# EAGLE board Tickler-Brains&Brawn (EAGLE 7.3.0)
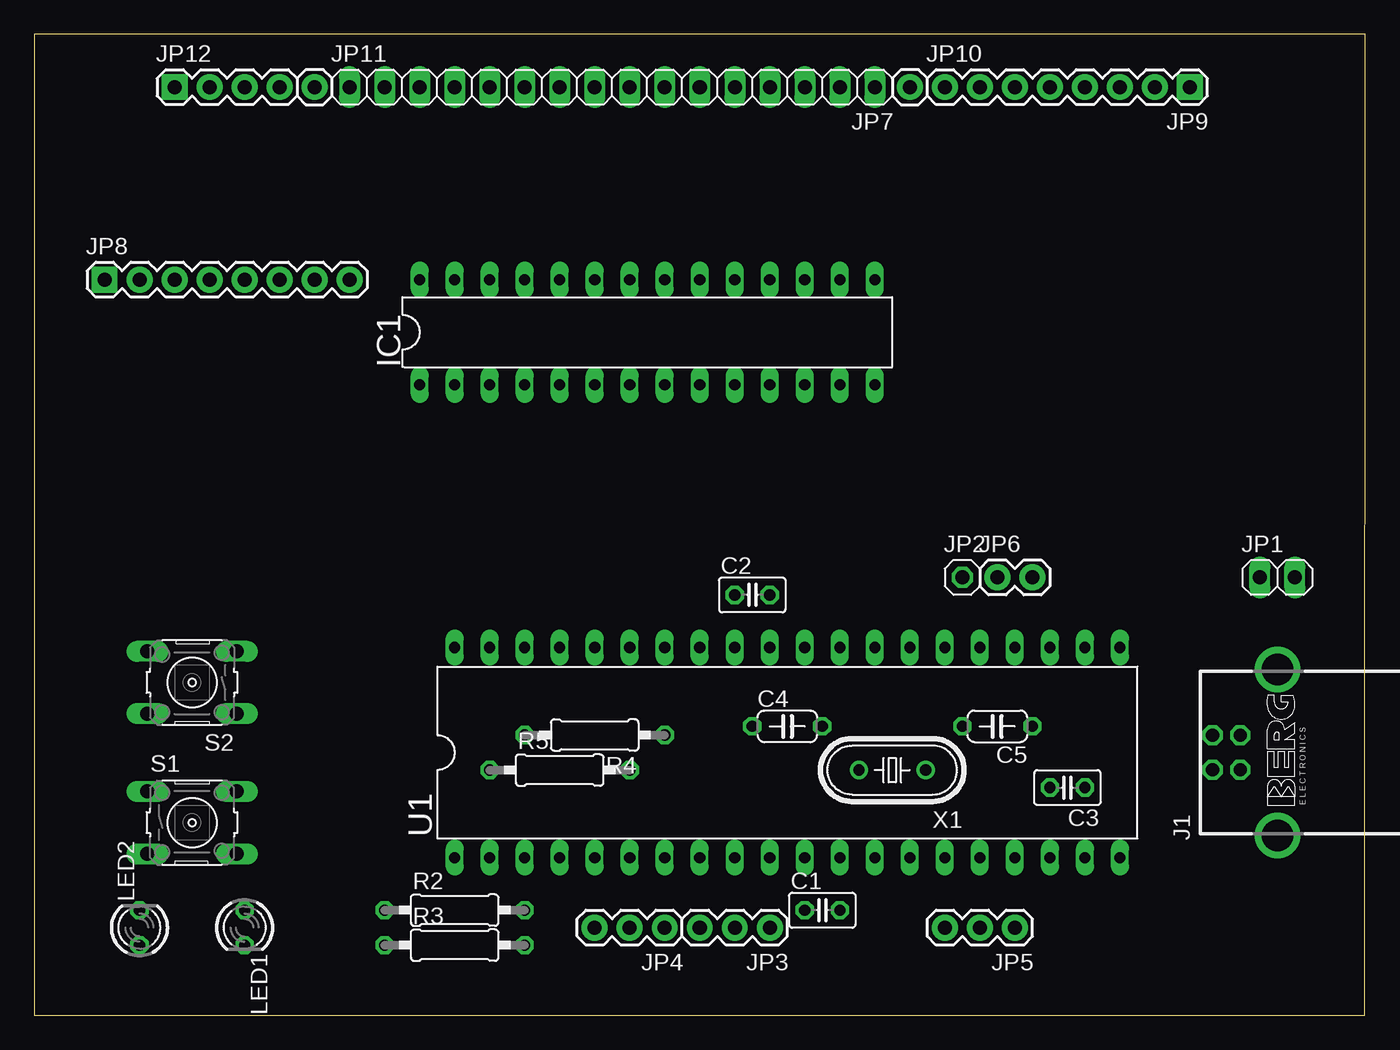
[diagram p0: board, top side]
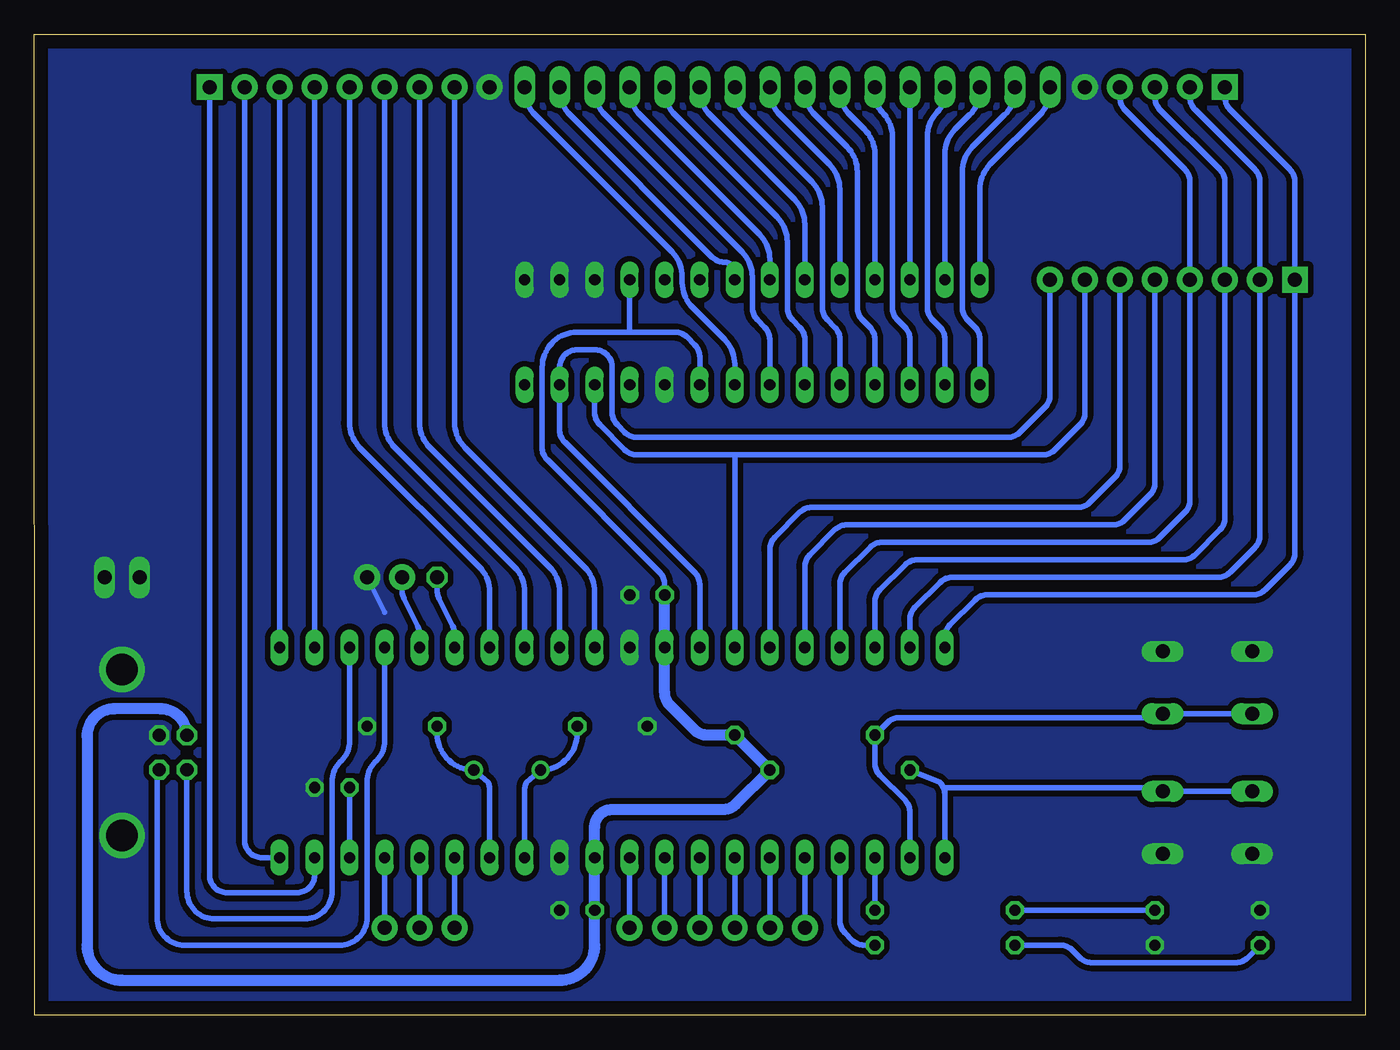
[diagram p1: board, bottom side, seen from below]

Size 96.52 x 71.12 mm. Coordinates in mm from the lower left corner, seen from the top.
Outline: 0,0 96.5,0 96.52,71.12 0,71.12 0,0
Copper layers (1*16): Top 0.035mm / dielectric 1.5mm / Bottom 0.035mm
Design rules "default": minimum track width 10mil, minimum drill 24mil, track to track 8mil, track to pad 8mil, pad to pad 8mil, via to via 8mil, smd to smd 8mil, copper to edge 40mil, drill to drill 8mil, minimum pad ring 10mil, minimum via ring 8mil, stop-mask expansion 4mil, vias tented up to drill 0mil, thermal gap 10mil

## Footprints (pad centres in the part's own frame; a part is rotated, then mirrored left to right if it is on the bottom)
C025-025X050 = drill 0.813 octagon: 1 -1.27,0; 2 1.27,0
C050-024X044 = drill 0.813 octagon: 1 -2.54,0; 2 2.54,0
DIL28-3 = drill 0.813 long: 1 -16.51,-3.81; 2 -13.97,-3.81; 3 -11.43,-3.81; 4 -8.89,-3.81; 5 -6.35,-3.81; 6 -3.81,-3.81; 7 -1.27,-3.81; 8 1.27,-3.81; 9 3.81,-3.81; 10 6.35,-3.81; 11 8.89,-3.81; 12 11.43,-3.81; 13 13.97,-3.81; 14 16.51,-3.81; 15 16.51,3.81; 16 13.97,3.81; 17 11.43,3.81; 18 8.89,3.81; 19 6.35,3.81; 20 3.81,3.81; 21 1.27,3.81; 22 -1.27,3.81; 23 -3.81,3.81; 24 -6.35,3.81; 25 -8.89,3.81; 26 -11.43,3.81; 27 -13.97,3.81; 28 -16.51,3.81
PN61729-S = drill 0.95 octagon: 1 1.25,4.71; 2 -1.25,4.71; 3 -1.25,2.71; 4 1.25,2.71 | drill 2.3 pad 2.9: S1 -6.02,0; S2 6.02,0
1X02 = drill 1.016 long: 1 -1.27,0; 2 1.27,0
1X01 = drill 1.016 octagon: 1 0,0
1X03 = drill 1.016 pad 1.88: 1 0,0; 2 2.54,0; 3 5.08,0
1X02' = drill 1.016 pad 1.88: 1 0,0; 2 2.54,0
1X16 = drill 1.016 long: 1 -19.05,0; 2 -16.51,0; 3 -13.97,0; 4 -11.43,0; 5 -8.89,0; 6 -6.35,0; 7 -3.81,0; 8 -1.27,0; 9 1.27,0; 10 3.81,0; 11 6.35,0; 12 8.89,0; 13 11.43,0; 14 13.97,0; 15 16.51,0; 16 19.05,0
1X08 = drill 1.016 pad 1.88 square: 1 0,0 | drill 1.016 pad 1.88: 2 2.54,0; 3 5.08,0; 4 7.62,0; 5 10.16,0; 6 12.7,0; 7 15.24,0; 8 17.78,0
1X01' = drill 1.016 pad 1.88: 1 0,0
1X04 = drill 1.016 pad 1.88 square: 1 0,0 | drill 1.016 pad 1.88: 2 2.54,0; 3 5.08,0; 4 7.62,0
LED3MM = drill 0.813 octagon: A -1.27,0; K 1.27,0
0207/10 = drill 0.813 octagon: 1 -5.08,0; 2 5.08,0
B3F-10XX = drill 1.016 long: 1 -3.251,2.261; 2 3.251,2.261; 3 -3.251,-2.261; 4 3.251,-2.261
DIL40 = drill 0.813 long: 1 -24.13,-7.62; 2 -21.59,-7.62; 3 -19.05,-7.62; 4 -16.51,-7.62; 5 -13.97,-7.62; 6 -11.43,-7.62; 7 -8.89,-7.62; 8 -6.35,-7.62; 9 -3.81,-7.62; 10 -1.27,-7.62; 11 1.27,-7.62; 12 3.81,-7.62; 13 6.35,-7.62; 14 8.89,-7.62; 15 11.43,-7.62; 16 13.97,-7.62; 17 16.51,-7.62; 18 19.05,-7.62; 19 21.59,-7.62; 20 24.13,-7.62; 21 24.13,7.62; 22 21.59,7.62; 23 19.05,7.62; 24 16.51,7.62; 25 13.97,7.62; 26 11.43,7.62; 27 8.89,7.62; 28 6.35,7.62; 29 3.81,7.62; 30 1.27,7.62; 31 -1.27,7.62; 32 -3.81,7.62; 33 -6.35,7.62; 34 -8.89,7.62; 35 -11.43,7.62; 36 -13.97,7.62; 37 -16.51,7.62; 38 -19.05,7.62; 39 -21.59,7.62; 40 -24.13,7.62
HC49U-V = drill 0.813: 1 -2.413,0; 2 2.413,0

## Placement (x,y rotation side)
C1  100nF  [C025-025X050]  57.15,7.62 0 top
C2  100nF  [C025-025X050]  52.07,30.48 0 top
C3  470nF  [C025-025X050]  74.93,16.51 180 top
C4  15pF  [C050-024X044]  54.61,20.95 0 top
C5  15pF  [C050-024X044]  69.85,20.95 180 top
IC1  MCP23S17SP  [DIL28-3]  44.45,49.53 0 top
J1  PN61729-S  [PN61729-S]  90.17,19.05 90 top
JP1  gnd  [1X02]  90.17,31.75 0 top
JP2  trig  [1X01]  67.31,31.75 0 top
JP3  [1X03]  53.34,6.35 180 top
JP4  [1X03]  45.72,6.35 180 top
JP5  [1X03]  71.12,6.35 180 top
JP6  tx  [1X02']  69.85,31.75 0 top
JP7  [1X16]  41.91,67.31 180 top
JP8  [1X08]  5.08,53.34 0 top
JP9  [1X08]  83.82,67.31 180 top
JP10  M01PTH  [1X01']  63.5,67.31 0 top
JP11  M01PTH  [1X01']  20.32,67.31 0 top
JP12  [1X04]  10.16,67.31 0 top
LED1  rdy  [LED3MM]  15.24,6.35 270 top
LED2  att  [LED3MM]  7.62,6.35 90 top
R2  1K  [0207/10]  30.48,7.62 0 top
R3  1K  [0207/10]  30.48,5.08 0 top
R4  10K  [0207/10]  40.64,20.32 180 top
R5  10K  [0207/10]  38.1,17.78 0 top
S1  reset  [B3F-10XX]  11.43,13.97 0 top
S2  usr/boot  [B3F-10XX]  11.43,24.13 180 top
U1  PIC18F4550_40  [DIL40]  54.61,19.05 0 top
X1  20Mhz  [HC49U-V]  62.23,17.78 180 top

## Library data of the parts
C1-C5 R2-R5 = rcl
IC1 = microchip; MF: MICROCHIP; MPN: MCP23S17-E/SP; OC_FARNELL: 1292238; OC_NEWARK: 31K2951
J1 = con-berg; OC_FARNELL: unknown; OC_NEWARK: unknown
JP1 JP2 JP7 = pinhead
JP3-JP6 JP8-JP12 = SparkFun
LED1 LED2 = led
S1 S2 = switch-omron; MPN: B3F-1000; OC_FARNELL: 176432; OC_NEWARK: 36M3542
U1 = microchip; MF: MICROCHIP; MPN: PIC18F4550-I/P; OC_FARNELL: 9321357; OC_NEWARK: 74K8623
X1 = crystal; OC_FARNELL: 1666969; OC_NEWARK: unknown

## Nets
!RESET: R5.1 S1.1 S1.2 U1.1
!USER: R4.2 S2.1 S2.2 U1.2
+5V: C1.1 C2.1 IC1.9 IC1.18 J1.1 R4.1 R5.2 U1.11 U1.32
A0: IC1.8 JP7.1
A1: IC1.21 JP7.2
A2: IC1.7 JP7.3
A3: IC1.22 JP7.4
A4: IC1.6 JP7.5
A5: IC1.23 JP7.6
A6: IC1.5 JP7.7
A7: IC1.24 JP7.8
A8: IC1.4 JP7.9
A9: IC1.25 JP7.10
A10: IC1.3 JP7.11
A11: IC1.26 JP7.12
A12: IC1.2 JP7.13
A13: IC1.27 JP7.14
A14: IC1.1 JP7.15
A15: IC1.28 JP7.16
B2: JP8.6 U1.35
B3: JP8.5 U1.36
B4: JP8.4 JP12.4 U1.37
B5: JP8.3 JP12.3 U1.38
B6: JP8.2 JP12.2 U1.39
B7: JP8.1 JP12.1 U1.40
D0: JP9.1 U1.19
D1: JP9.2 U1.20
D2: JP9.3 U1.21
D3: JP9.4 U1.22
D4: JP9.5 U1.27
D5: JP9.6 U1.28
D6: JP9.7 U1.29
D7: JP9.8 U1.30
D+: J1.3 U1.24
D-: J1.2 U1.23
GND: C1.2 C2.2 C3.1 C4.1 C5.1 IC1.10 IC1.15 IC1.16 IC1.17 J1.4 J1.S1 J1.S2 JP1.1 JP1.2 JP6.2 JP10.1 JP11.1 LED1.K LED2.K S1.3 S1.4 S2.3 S2.4 U1.12 U1.31
LED-ATTACHED: R3.2 U1.4
LED-READY: R2.2 U1.3
N$2: LED1.A R2.1
N$3: LED2.A R3.1
N$11: C3.2 U1.18
N$12: JP3.1 U1.10
N$13: JP3.2 U1.9
N$14: JP3.3 U1.8
N$15: JP4.1 U1.7
N$16: JP4.2 U1.6
N$17: JP4.3 U1.5
N$18: JP5.1 U1.17
N$19: JP5.2 U1.16
N$20: JP5.3 U1.15
SCL: IC1.12 JP8.7 U1.34
SCOPETRIG: JP2.1 U1.26
SDA: IC1.13 JP8.8 U1.33
TX: JP6.1 U1.25
X1: C4.2 U1.13 X1.2
X2: C5.2 U1.14 X1.1

## Tracks (layer width: path | path; a pad name or v marks a point on that pad's centre or on a via)
!RESET
  Bottom 0.406: S1.1 S1.2 15,16.51 30.48,16.51 30.48,15.98 | U1.1 30.48,15.98 | 30.48,15.98 arc-45 30.85,16.88 R5.1
!USER
  Bottom 0.406: S2.2 S2.1 14.96,21.59 33.76,21.59 arc-45 34.66,21.22 R4.2 35.56,18.31 arc-45 35.19,17.41 33.39,15.61 arc45 33.02,14.71 U1.2
+5V
  Bottom 0.406: 53.34,49.53 57.15,49.53 arc-90 59.69,46.99 59.69,41.17 arc-45 59.32,40.27 51.17,32.12 arc45 50.8,31.22 C2.1 | IC1.18 53.34,49.53 | IC1.9 48.26,47.73 arc-45 48.63,48.63 49.16,49.16 arc-45 50.06,49.53 53.34,49.53
  Bottom 0.813: C2.1 U1.32 50.8,23.39 arc-45 50.43,22.49 48.63,20.69 arc-45 47.73,20.32 R4.1 R5.2 45.67,15.29 arc45 46.56,14.92 54.61,14.92 arc-90 55.88,13.65 U1.11 C1.1 55.88,5.08 arc90 58.42,2.54 90.17,2.54 arc90 92.71,5.08 92.71,20.23 arc90 90.71,22.23 87.38,22.23 arc90 J1.1
A0
  Bottom 0.406: IC1.8 45.72,47.21 arc-45 46.46,49 48.79,51.33 arc45 49.53,53.12 49.53,53.56 arc-45 50.27,55.35 60.22,65.3 arc45 60.96,67.09 JP7.1
A1
  Bottom 0.406: IC1.21 45.72,53.87 arc-90 46.46,54.61 arc45 47.36,54.98 57.68,65.3 arc45 58.42,67.09 JP7.2
A2
  Bottom 0.406: IC1.7 43.18,49 arc-45 43.55,49.9 44.08,50.43 arc45 44.45,51.33 44.45,53.56 arc-45 45.19,55.35 55.14,65.3 arc45 55.88,67.09 JP7.3
A3
  Bottom 0.406: IC1.22 43.18,54.83 arc-45 43.92,56.62 52.6,65.3 arc45 53.34,67.09 JP7.4
A4
  Bottom 0.406: IC1.6 40.64,49 arc-45 41.01,49.9 41.54,50.43 arc45 41.91,51.33 41.91,56.1 arc-45 42.65,57.89 50.06,65.3 arc45 50.8,67.09 JP7.5
A5
  Bottom 0.406: IC1.23 40.64,57.37 arc-45 41.38,59.16 47.52,65.3 arc45 48.26,67.09 JP7.6
A6
  Bottom 0.406: IC1.5 38.1,49 arc-45 38.47,49.9 39,50.43 arc45 39.37,51.33 39.37,58.64 arc-45 40.11,60.43 44.98,65.3 arc45 45.72,67.09 JP7.7
A7
  Bottom 0.406: IC1.24 38.1,59.91 arc-45 38.84,61.7 42.44,65.3 arc45 43.18,67.09 JP7.8
A8
  Bottom 0.406: IC1.4 35.56,49 arc-45 35.93,49.9 36.46,50.43 arc45 36.83,51.33 36.83,61.18 arc-45 37.57,62.97 39.9,65.3 arc45 40.64,67.09 JP7.9
A9
  Bottom 0.406: IC1.25 35.56,62.45 arc-45 36.3,64.24 37.36,65.3 arc45 38.1,67.09 JP7.10
A10
  Bottom 0.406: IC1.3 33.02,49 arc-45 33.39,49.9 33.92,50.43 arc45 34.29,51.33 34.29,63.72 arc-45 35.03,65.51 arc45 35.56,66.78 JP7.11
A11
  Bottom 0.406: IC1.26 JP7.12
A12
  Bottom 0.406: IC1.2 30.48,49 arc-45 30.85,49.9 31.38,50.43 arc45 31.75,51.33 31.75,63.72 arc45 31.01,65.51 arc-45 30.48,66.78 JP7.13
A13
  Bottom 0.406: IC1.27 30.48,62.45 arc45 29.74,64.24 28.68,65.3 arc-45 27.94,67.09 JP7.14
A14
  Bottom 0.406: IC1.1 27.94,49 arc-45 28.31,49.9 28.84,50.43 arc45 29.21,51.33 29.21,61.18 arc45 28.47,62.97 26.14,65.3 arc-45 25.4,67.09 JP7.15
A15
  Bottom 0.406: IC1.28 27.94,59.91 arc45 27.2,61.7 23.6,65.3 arc-45 22.86,67.09 JP7.16
B2
  Bottom 0.406: U1.35 43.18,33.76 arc45 42.81,34.66 41.01,36.46 arc45 40.11,36.83 20.85,36.83 arc-45 19.95,37.2 18.15,39 arc-45 17.78,39.9 JP8.6
B3
  Bottom 0.406: U1.36 40.64,32.49 arc45 40.27,33.39 38.47,35.19 arc45 37.57,35.56 18.31,35.56 arc-45 17.41,35.93 15.61,37.73 arc-45 15.24,38.63 JP8.5
B4
  Bottom 0.406: U1.37 38.1,31.22 arc45 37.73,32.12 35.93,33.92 arc45 35.03,34.29 15.77,34.29 arc-45 14.87,34.66 13.07,36.46 arc-45 12.7,37.36 JP8.4 12.7,60.43 arc-45 13.07,61.33 17.41,65.67 arc45 17.78,66.57 JP12.4
B5
  Bottom 0.406: U1.38 35.56,29.95 arc45 35.19,30.85 33.39,32.65 arc45 32.49,33.02 13.23,33.02 arc-45 12.33,33.39 10.53,35.19 arc-45 10.16,36.09 JP8.3 10.16,60.43 arc-45 10.53,61.33 14.87,65.67 arc45 15.24,66.57 JP12.3
B6
  Bottom 0.406: U1.39 33.02,28.68 arc45 32.65,29.58 30.85,31.38 arc45 29.95,31.75 10.69,31.75 arc-45 9.79,32.12 7.99,33.92 arc-45 7.62,34.82 JP8.2 7.62,60.43 arc-45 7.99,61.33 12.33,65.67 arc45 12.7,66.57 JP12.2
B7
  Bottom 0.406: U1.40 30.48,27.41 arc45 30.11,28.31 28.31,30.11 arc45 27.41,30.48 8.15,30.48 arc-45 7.25,30.85 5.45,32.65 arc-45 5.08,33.55 JP8.1 5.08,60.43 arc-45 5.45,61.33 9.79,65.67 arc45 10.16,66.57 JP12.1
D0
  Bottom 0.406: JP9.1 83.82,10.16 arc-90 82.55,8.89 77.47,8.89 arc-90 76.2,10.16 U1.19
D1
  Bottom 0.406: U1.20 80.01,11.43 arc90 81.28,12.7 JP9.2
D2
  Bottom 0.406: U1.21 JP9.3
D3
  Bottom 0.406: U1.22 JP9.4
D4
  Bottom 0.406: JP9.5 73.66,42.96 arc-45 72.92,41.17 64.24,32.49 arc45 63.5,30.7 U1.27
D5
  Bottom 0.406: JP9.6 71.12,42.96 arc-45 70.38,41.17 61.7,32.49 arc45 60.96,30.7 U1.28
D6
  Bottom 0.406: JP9.7 68.58,42.96 arc-45 67.84,41.17 59.16,32.49 arc45 58.42,30.7 U1.29
D7
  Bottom 0.406: U1.30 55.88,30.7 arc-45 56.62,32.49 65.3,41.17 arc45 66.04,42.96 JP9.8
D+
  Bottom 0.406: U1.24 71.12,19.88 arc45 71.71,18.46 71.8,18.37 arc-45 72.39,16.95 72.39,7.08 arc90 74.39,5.08 85.63,5.08 arc90 87.63,7.08 87.63,17.63 J1.3
D-
  Bottom 0.406: U1.23 73.66,19.88 arc45 74.25,18.46 74.34,18.37 arc-45 74.93,16.95 74.93,8.98 arc90 76.93,6.99 83.46,6.99 arc90 85.46,8.98 J1.2
GND
  Bottom 0.406: JP6.2 71.12,29.21
  pour Bottom (isolate 0.406, no thermals): 0,71.12 96.52,71.12 96.52,0 0,0
LED-ATTACHED
  Bottom 0.406: U1.4 38.1,6.88 arc-45 37.73,5.98 37.2,5.45 arc-45 36.3,5.08 R3.2
LED-READY
  Bottom 0.406: U1.3 R2.2
N$2
  Bottom 0.406: R2.1 LED1.A
N$3
  Bottom 0.406: R3.1 22.12,5.08 arc45 21.22,4.71 20.69,4.18 arc-45 19.79,3.81 9.42,3.81 arc-45 8.52,4.18 LED2.A
N$11
  Bottom 0.406: U1.18 C3.2
N$12
  Bottom 0.406: JP3.1 U1.10
N$13
  Bottom 0.406: U1.9 JP3.2
N$14
  Bottom 0.406: JP3.3 U1.8
N$15
  Bottom 0.406: U1.7 JP4.1
N$16
  Bottom 0.406: JP4.2 U1.6
N$17
  Bottom 0.406: JP4.3 U1.5
N$18
  Bottom 0.406: U1.17 JP5.1
N$19
  Bottom 0.406: U1.16 JP5.2
N$20
  Bottom 0.406: U1.15 JP5.3
SCL
  Bottom 0.406: U1.34 45.72,40.64 | 45.72,40.64 52.81,40.64 arc45 53.71,41.01 55.51,42.81 arc45 55.88,43.71 IC1.12 | JP8.7 20.32,43.71 arc45 20.69,42.81 22.49,41.01 arc45 23.39,40.64 45.72,40.64
SCOPETRIG
  Bottom 0.406: JP2.1 67.31,30.78 arc-27 67.18,30.21 66.17,28.21 arc27 66.04,27.64 U1.26
SDA
  Bottom 0.406: JP8.8 22.86,44.98 arc45 23.23,44.08 25.03,42.28 arc45 25.93,41.91 52.81,41.91 arc45 53.71,42.28 54.24,42.81 arc45 54.61,43.71 54.61,46.99 arc-90 55.88,48.26 57.15,48.26 arc-90 58.42,46.99 IC1.13 58.42,42.44 arc-45 58.05,41.54 48.63,32.12 arc45 48.26,31.22 U1.33
TX
  Bottom 0.406: U1.25 68.58,27.64 arc-27 68.71,28.21 69.72,30.21 arc27 69.85,30.78 JP6.1
X1
  Bottom 0.406: U1.13 60.96,16.35 arc25 60.84,16.89 X1.2 arc-90 57.15,20.45 C4.2
X2
  Bottom 0.406: U1.14 63.5,16.35 arc-25 63.62,16.89 X1.1 arc90 67.31,20.45 C5.2

## Text on the board
tDocu: 1